# Allegro board JY02A_TEST_V10A.brd
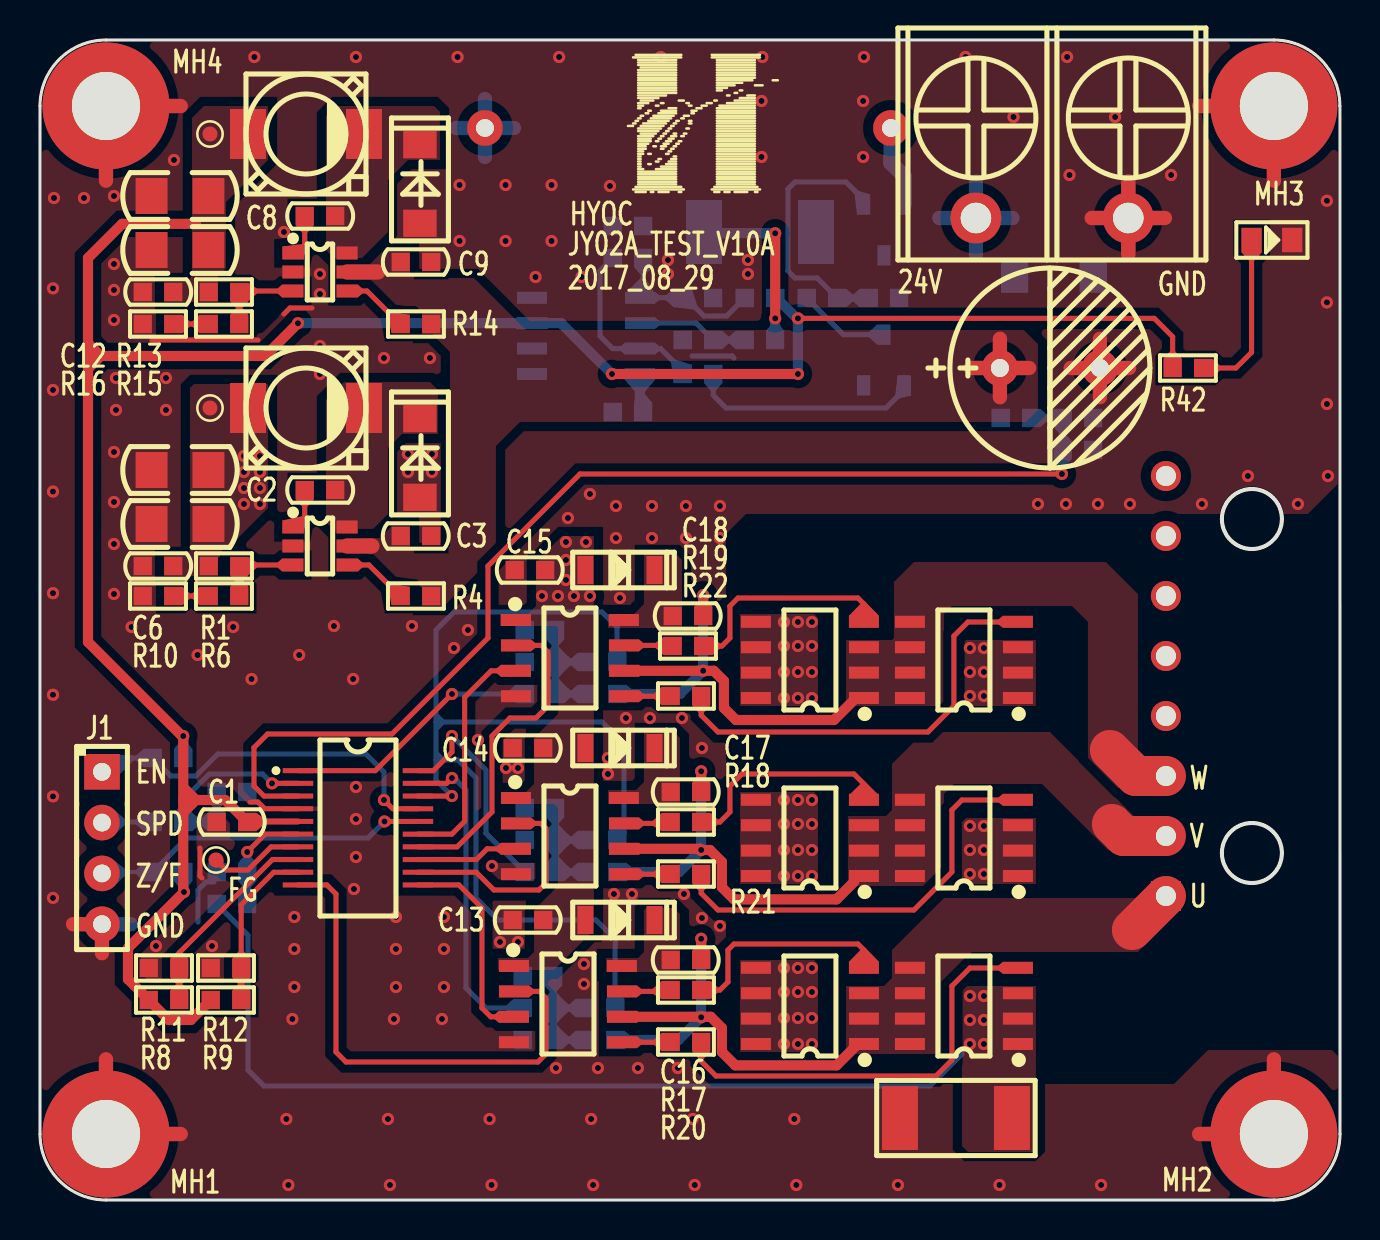
[diagram p0: board, top side]
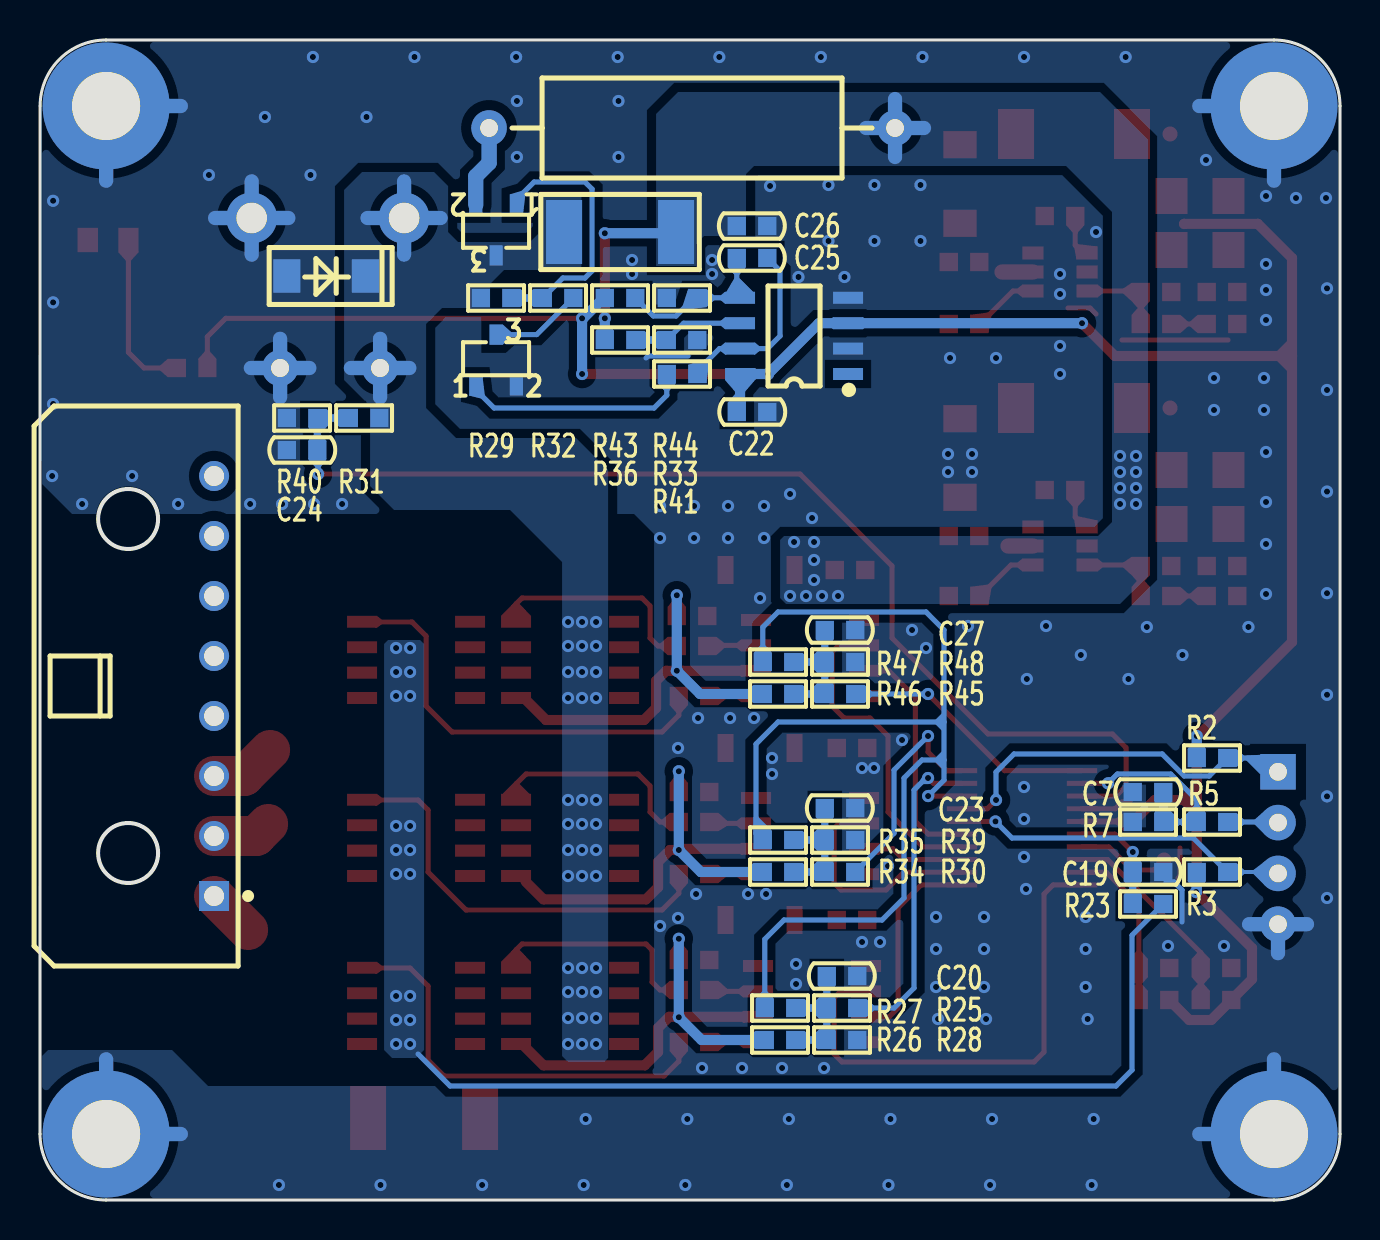
[diagram p1: board, bottom side, seen from below]

Outline 65.01 x 58 mm; copper layers: TOP, BOTTOM. Coordinates in mm from the lower left corner of the outline.
Outline path: 0,54.7 0,3.3 arc(0.97,0.97) 3.3,0 61.71,0 arc(64.04,0.96) 65.01,3.29 65,54.7 arc(64.03,57.03) 61.7,58 3.3,58 arc(0.97,57.03) 0,54.7

## Placement (name value [footprint] x y rotation side)
C1  0.1uF_50V  [CC0603]  9.6 18.9 180 top
C2  10nF_50V  [CC0603]  14 35.5 0 top
C3  0.1uF_50V  [CC0603]  18.8 33.2 180 top
C4  10uF_25V  [CC1206]  7 33.8 180 top
C5  10uF_25V  [CC1206]  7 36.5 180 top
C6  0.1uF_50V  [CC0603]  5.9 31.7 0 top
C7  1uF_50V  [CC0603]  9.6 20.4 180 bottom
C8  10nF_50V  [CC0603]  14 49.2 0 top
C9  0.1uF_50V  [CC0603]  18.8 46.9 180 top
C10  10uF_25V  [CC1206]  7 50.2 180 top
C11  10uF_25V  [CC1206]  7 47.5 180 top
C12  0.1uF_50V  [CC0603]  5.9 45.4 0 top
C13  0.1uF_50V  [CC0603]  24.4 14 180 top
C14  0.1uF_50V  [CC0603]  24.4 22.6 180 top
C15  0.1uF_50V  [CC0603]  24.5 31.5 180 top
C16  1uF_50V  [CC0603]  32.3 12 180 top
C17  1uF_50V  [CC0603]  32.3 20.4 180 top
C18  1uF_50V  [CC0603]  32.4 29.2 180 top
C19  0.1uF_50V  [CC0603]  9.6 16.4 0 bottom
C20  0.47uF_50V  [CC0603]  24.9 11.2 0 bottom
C21  100uF_50V_10X13  [CAP-5R0-10X13]  48 41.6 0 top
C22  0.1uF_50V  [CC0603]  29.4 39.4 180 bottom
C23  0.47uF_50V  [CC0603]  25 19.6 0 bottom
C24  1uF_50V  [CC0603]  51.9 37.5 180 bottom
C25  100pF_50V  [CC0603]  29.4 47.1 0 bottom
C26  0.1uF_50V  [CC0603]  29.4 48.7 0 bottom
C27  0.47uF_50V  [CC0603]  25 28.5 0 bottom
D1  SS14  [DO-214AC]  19 37.1 270 top
D2  SS14  [DO-214AC]  19 50.8 270 top
D3  1N4148W-TP  [SOD-123]  27.4 14 0 top
D4  1N4148W-TP  [SOD-123]  27.4 22.6 0 top
D5  1N4148W-TP  [SOD-123]  27.4 31.5 0 top
D6  SS14  [DO-214AC]  50.7 46.2 0 bottom
D7  LED_GREEN  [LED0805]  61.6 48 0 top
J1  -  [HEADER4X1_2R54]  3.1 17.6 270 top
J2  -  [43650-0800]  56.3 25.7 0 bottom
J3  -  [KF7R62-2P]  46.8 49.1 0 top
L1  SLF6028T-4R7M1R6-PF  [L-SLF6028]  13.3 39.6 270 top
L2  SLF6028T-4R7M1R6-PF  [L-SLF6028]  13.3 53.3 270 top
MH1  HOLD-M3  [HOLD250D134]  3.3 3.3 0 top
MH2  HOLD-M3  [HOLD250D134]  61.7 3.3 0 top
MH3  HOLD-M3  [HOLD250D134]  61.7 54.7 0 top
MH4  HOLD-M3  [HOLD250D134]  3.3 54.7 0 top
NOREF  -  []  0 0 0 top
NOREF#2  -  []  0 0 0 top
NOREF#3  -  []  0 0 90 top
NOREF#4  -  []  0 0 90 top
NOREF#5  -  []  0 0 90 top
NOREF#6  -  []  0 0 0 top
Q1  SI4410BDY-T1-E3  [SOIC8]  38.5 9.7 90 top
Q2  SI4410BDY-T1-E3  [SOIC8]  38.5 18.1 90 top
Q3  SI4410BDY-T1-E3  [SOIC8]  38.5 27 90 top
Q4  SI4410BDY-T1-E3  [SOIC8]  46.2 9.7 90 top
Q5  SI4410BDY-T1-E3  [SOIC8]  46.2 18.1 90 top
Q6  SI4410BDY-T1-E3  [SOIC8]  46.2 27 90 top
Q7  MMBT5401LT1G  [SOT23_123]  42.2 48.5 0 bottom
Q8  MMBT5551LT1G  [SOT23_123]  42.2 42 180 bottom
R1  49.9k  [RC0603]  9.2 31.7 0 top
R2  10K  [RC0603]  6.4 22.1 180 bottom
R3  10K  [RC0603]  6.4 16.4 180 bottom
R4  100K  [RC0603]  18.8 30.2 0 top
R5  10K  [RC0603]  6.4 18.9 180 bottom
R6  0R  [RC0603]  9.2 30.2 180 top
R7  1M  [RC0603]  9.6 18.9 0 bottom
R8  10K  [RC0603]  6.2 10 0 top
R9  10K  [RC0603]  9.3 10 0 top
R10  3.61K  [RC0603]  5.9 30.2 180 top
R11  2.2K  [RC0603]  6.2 11.6 180 top
R12  2.2K  [RC0603]  9.3 11.6 180 top
R13  49.9k  [RC0603]  9.2 45.4 0 top
R14  100K  [RC0603]  18.8 43.8 0 top
R15  0R  [RC0603]  9.2 43.8 180 top
R16  9.53K  [RC0603]  5.9 43.8 180 top
R17  51R  [RC0603]  32.3 10.5 180 top
R18  51R  [RC0603]  32.3 18.9 180 top
R19  51R  [RC0603]  32.4 27.7 180 top
R20  51R  [RC0603]  32.3 7.9 180 top
R21  51R  [RC0603]  32.3 16.3 180 top
R22  51R  [RC0603]  32.3 25.2 180 top
R23  10K  [RC0603]  9.6 14.8 0 bottom
R24  0R02  [RC2512]  45.8 4.1 0 top
R25  10K  [RC0603]  24.9 9.6 0 bottom
R26  100K  [RC0603]  28 8 0 bottom
R27  10K  [RC0603]  28 9.6 180 bottom
R28  10K  [RC0603]  24.9 8 180 bottom
R29  2.2K  [RC0603]  42.2 45.1 180 bottom
R30  10K  [RC0603]  25 16.4 0 bottom
R31  100K  [RC0603]  48.8 39.1 0 bottom
R32  10K  [RC0603]  39.1 45.1 180 bottom
R33  3K  [RC0603]  32.9 43 0 bottom
R34  100K  [RC0603]  28.1 16.4 0 bottom
R35  10K  [RC0603]  28.1 18 180 bottom
R36  10K  [RC0603]  36 43 180 bottom
R37  MFR02WF2000A10  [AXIAL-0R8]  32.4 53.6 0 bottom
R38  4.7K/1W  [RC2512]  36 48.4 0 bottom
R39  10K  [RC0603]  25 18 180 bottom
R40  10K  [RC0603]  51.9 39.1 0 bottom
R41  1K  [RC0603]  32.9 41.3 0 bottom
R42  1K  [RC0603]  57.4 41.6 180 top
R43  2.2K  [RC0603]  36 45.1 180 bottom
R44  2.2K  [RC0603]  32.9 45.1 0 bottom
R45  10K  [RC0603]  25 25.3 0 bottom
R46  100K  [RC0603]  28.1 25.3 0 bottom
R47  10K  [RC0603]  28.1 26.9 180 bottom
R48  10K  [RC0603]  25 26.9 180 bottom
TP1  TestPoint  [TP-0R75]  8.5 39.6 0 top
TP2  TestPoint  [TP-0R75]  8.5 53.3 0 top
TP3  TestPoint  [TP-0R75]  8.8 17 0 top
U1  JY02A  [SSOP-20]  15.9 18.6 270 top
U2  MP2359DJ-LF-Z  [TSOT23-6]  14 32.7 270 top
U3  MP2359DJ-LF-Z  [TSOT23-6]  14 46.4 270 top
U4  IR2101S  [SOIC8]  26.4 9.8 270 top
U5  IR2101S  [SOIC8]  26.5 18.2 270 top
U6  IR2101S  [SOIC8]  26.5 27.1 270 top
U7  LM2904VQDR  [SOIC8]  27.3 43.2 90 bottom

## Library data of the parts
C1-C20 C22-C27 = CAP NP_2
C21 = CAPT_100UF_3528_6r3V_10%_LXXXX
D1 D2 D6 = DIODE13_0
D3-D5 = DIODE13_7
D7 = LED_4
J1 = CONN RCPT 4
J2 = 43650-0801
J3 = CONN RCPT 2
L1 L2 = INDUCTOR_0
MH1-MH4 = Hold_1
Q1-Q6 = SI4410BDY-T1-E3
Q7 = L14G1/TO_1
Q8 = L14G1/TO_2
R1-R23 R25-R36 R39-R48 = R_Generic
R24 R37 R38 = R_10k_2
TP1-TP3 = TestPoint
U1 = JY02A
U2 U3 = MP2359DJ-LF-Z
U4-U6 = IR2101S
U7 = LM2904VQDR

## Footprints (pads in the part's own frame, mm; a bottom-side part is the same pattern mirrored in y, then rotated)
43650-0800
  rect 1.5x1.5 hole 1: 1(0,10.5)
  round 1.5 hole 1: 2(0,7.5) 3(0,4.5) 4(0,1.5) 5(0,-1.5) 6(0,-4.5) 7(0,-7.5) 8(0,-10.5)
AXIAL-0R8
  round 1.778 hole 0.889: 1(-10.15,0) 2(10.15,0)
CAP-5R0-10X13
  round 1.8 hole 0.9: 1(0,0) 2(5,0)
CC0603
  rect 0.914x0.914 smd: 1(-0.762,0) 2(0.762,0)
CC1206
  rect 1.6x1.8 smd: 1(-1.422,0) 2(1.422,0)
DO-214AC
  rect 1.36x1.67 smd: 1(1.965,0) 2(-1.965,0)
HEADER4X1_2R54
  rect 1.778x1.778 hole 0.889: 1(-3.81,0)
  round 1.778 hole 0.889: 2(-1.27,0) 3(1.27,0) 4(3.81,0)
HOLD250D134
  round 6.35 hole 3.404: 1(0,0)
KF7R62-2P
  round 2.54 hole 1.524: 1(0,0) 2(7.62,0)
L-SLF6028
  rect 2.5x1.8 smd: 1(0,2.9) 2(0,-2.9)
LED0805
  rect 1.016x1.219 smd: 1(-1.016,0) 2(1.016,0)
RC0603
  rect 0.914x0.914 smd: 1(-0.762,0) 2(0.762,0)
RC2512
  rect 1.8x3.2 smd: 1(-2.8,0) 2(2.8,0)
SOD-123
  rect 0.8x1.4 smd: 1(-0.127,0) 2(3.327,0)
SOIC8
  rect 0.6x1.5 smd: 1(-1.9,-2.7) 2(-0.63,-2.7) 3(0.64,-2.7) 4(1.91,-2.7) 5(1.91,2.7) 6(0.64,2.7) 7(-0.63,2.7) 8(-1.9,2.7)
SOT23_123
  rect 0.66x1.016 smd: 1(-1.016,-1.27) 2(1.016,-1.27) 3(0,1.27)
SSOP-20
  rect 0.25x1.52 smd: 1(-2.868,-3) 2(-2.232,-3) 3(-1.597,-3) 4(-0.963,-3) 5(-0.328,-3) 6(0.307,-3) 7(0.943,-3) 8(1.577,-3) 9(2.212,-3) 10(2.848,-3) 11(2.848,3) 12(2.212,3) 13(1.577,3) 14(0.943,3) 15(0.307,3) 16(-0.328,3) 17(-0.963,3) 18(-1.597,3) 19(-2.232,3) 20(-2.868,3)
TP-0R75
  round 0.75 smd: 1(0,0)
TSOT23-6
  rect 0.65x1.06 smd: 1(-0.95,-1.354) 2(0,-1.354) 3(0.95,-1.354) 4(0.95,1.354) 5(0,1.354) 6(-0.95,1.354)

## Nets
GND: C1.2 C3.1 C4.2 C5.2 C6.1 C7.1 C9.1 C10.2 C11.2 C12.1 C13.2 C14.2 C15.2 C19.1 C20.1 C21.2 C22.2 C23.1 C24.1 C26.1 C27.1 D1.1 D2.1 D6.1 D7.2(CATHODE) J1.4 J3.2 MH1.1 MH2.1 MH3.1 MH4.1 Q8.2(E) R7.2 R10.2 R11.2 R12.2 R16.2 R24.1 R28.2 R33.1 R39.2 R40.2 R44.2 R48.2 U1.4(GND) U2.2(GND) U3.2(GND) U4.4(COM) U5.4(COM) U6.4(COM) U7.2(1IN-) U7.4(GND)
VCC_5V: C1.1 C10.1 C11.1 C12.2 C22.1 L2.2 R2.1 R3.1 R8.1 R9.1 R13.1 R42.2 R43.1 TP2.1 U1.5(VDD) U7.3(1IN+) U7.8(VCC)
VCC_12V: C4.1 C5.1 C6.2 C13.1 C14.1 C15.1 C26.2 D3.1(ANODE) D4.1(ANODE) D5.1(ANODE) L1.2 R1.1 R36.1 R37.1 R38.1 TP1.1 U4.1(VCC) U5.1(VCC) U6.1(VCC)
VCC_24V: C3.2 C9.2 C21.1 D6.2 J3.1 Q1.5(D_1) Q1.6(D_2) Q1.7(D_3) Q1.8(D_4) Q2.5(D_1) Q2.6(D_2) Q2.7(D_3) Q2.8(D_4) Q3.5(D_1) Q3.6(D_2) Q3.7(D_3) Q3.8(D_4) Q7.3(C) R4.2 R14.2 R29.1 R31.1 R38.2 U2.5(IN) U3.5(IN)
AB: U1.11(AB) U4.3(LIN)
AT: U1.10(AT) U4.2(HIN)
BB: U1.13(BB) U5.3(LIN)
BT: U1.12(BT) U5.2(HIN)
CB: U1.15(CB) U6.3(LIN)
CT: U1.14(CT) U6.2(HIN)
EL#: J1.1 R2.2 U1.17(EL)
EMF: R27.1 R35.1 R47.1 U1.18(EMF)
EMFA: R25.1 U1.19(EMFA)
EMFB: R30.1 U1.20(EMFB)
EMFC: R45.1 U1.1(EMFC)
FG: TP3.1 U1.7(FG)
IS: C19.2 R23.2 U1.6(IS)
MOTOR_U: C16.1 J2.1 Q1.1(S_1) Q1.2(S_2) Q1.3(S_3) Q4.5(D_1) Q4.6(D_2) Q4.7(D_3) Q4.8(D_4) R26.2 U4.6(VS)
MOTOR_V: C17.1 J2.2 Q2.1(S_1) Q2.2(S_2) Q2.3(S_3) Q5.5(D_1) Q5.6(D_2) Q5.7(D_3) Q5.8(D_4) R34.2 U5.6(VS)
MOTOR_W: C18.1 J2.3 Q3.1(S_1) Q3.2(S_2) Q3.3(S_3) Q6.5(D_1) Q6.6(D_2) Q6.7(D_3) Q6.8(D_4) R46.2 U6.6(VS)
STIME: R8.2 R11.1 U1.8(STIME)
TORGUE: R9.2 R12.1 U1.9(TORGUE)
VOD: C24.2 R31.2 R40.1 U1.3(VOD)
VR: C7.2 R5.1 R7.1 U1.2(VR)
Z/F: J1.3 R3.2 U1.16(Z/F)
N16934906: D7.1(ANODE) R42.1
N16936692: C16.2 D3.2(CATHODE) U4.8(VB)
N16936701: R17.2 U4.7(HO)
N16936704: R20.2 U4.5(LO)
N16937026: Q1.4(G) R17.1
N16937206: Q4.4(G) R20.1
N16937240: Q4.1(S_1) Q4.2(S_2) Q4.3(S_3) Q5.1(S_1) Q5.2(S_2) Q5.3(S_3) Q6.1(S_1) Q6.2(S_2) Q6.3(S_3) R23.1 R24.2
N16938453: C17.2 D4.2(CATHODE) U5.8(VB)
N16938459: R18.2 U5.7(HO)
N16938461: R21.2 U5.5(LO)
N16938515: Q2.4(G) R18.1
N16938556: Q5.4(G) R21.1
N16939336: C18.2 D5.2(CATHODE) U6.8(VB)
N16939342: R19.2 U6.7(HO)
N16939344: R22.2 U6.5(LO)
N16939398: Q3.4(G) R19.1
N16939439: Q6.4(G) R22.1
N16940922: C20.2 R25.2 R26.1 R27.2 R28.1
N16941559: C23.2 R30.2 R34.1 R35.2 R39.1
N16941955: C27.2 R45.2 R46.1 R47.2 R48.1
N16944598: J1.2 R5.2
N16947370: C25.2 R43.2 R44.1 U7.5(2IN+)
N16947961: R33.2 R36.2 U7.6(2IN-)
N16948008: C25.1 R41.1 U7.7(2OUT)
N16948147: Q8.1(B) R41.2
N16952645: Q8.3(C) R32.2
N16952665: Q7.1(B) R29.2 R32.1
N16952973: Q7.2(E) R37.2
N16955297: C2.2 D1.2 L1.1 U2.6(SW)
N16955299: C2.1 U2.1(BST)
N16955317: R1.2 R6.1 U2.3(FB)
N16955459: R4.1 U2.4(EN)
N16956846: R6.2 R10.1
N16960800: R15.2 R16.1
N16960840: C8.2 D2.2 L2.1 U3.6(SW)
N16960842: C8.1 U3.1(BST)
N16960860: R13.2 R15.1 U3.3(FB)
N16960963: R14.1 U3.4(EN)

Pads without a net: J2 4 5 6 7 8; U7 1

## Via types
v1: diameter 0.61, hole 0.305, TOP to BOTTOM, 244 vias

## Routing (per net, layer and track width the routed paths; a pad name or vN(x,y) marks a point on that pad's centre or on a via; arc(x,y) is an arc through that point)
GND: length 109
  TOP w0.203: 43,0.85 v1(42.9,0.75)
  TOP w0.254: 8,17.6 8,16.2 8.1,16.1 ; 12.2,44.3 12.5,44.6 13.6,44.6 ; U1.4 11.24,19.56 10.9,19.9 10.5,19.9 ; 5.6,43 10.9,43
  TOP w0.711: 51.54,41.6 C21.2 ; C21.2 54.46,41.6 ; C21.2 53,40.14 ; C21.2 53,43.06 ; 1.65,13.79 J1.4 3.1,12.34 ; 52.59,49.1 J3.2 ; J3.2 56.25,49.1 ; J3.2 54.42,47.27 ; J3.2 54.42,50.93 ; 7.03,3.3 MH1.1 3.3,7.03 ; 61.7,7.03 MH2.1 57.97,3.3 ; 7.03,54.7 MH4.1 3.3,50.97 ; 61.7,50.97 MH3.1 57.97,54.7
  BOTTOM w0.254: 8.7,15.9 8.3,15.9 7.9,15.5 7.9,13.9 ; 34.7,42.1 34.6,42.2 32.6,42.2
  BOTTOM w0.711: J3.2 56.25,49.1 ; J3.2 54.42,47.27 ; J3.2 52.59,49.1 ; J3.2 54.42,50.93 ; 61.7,50.97 MH3.1 57.97,54.7 ; 1.65,13.79 J1.4 ; J1.4 3.1,12.34 ; J1.4 4.55,13.79 ; 57.97,3.3 MH2.1 61.7,7.03 ; 3.3,50.97 MH4.1 7.03,54.7 ; 53,40.14 C21.2 ; C21.2 53,43.06 ; C21.2 51.54,41.6 ; C21.2 54.46,41.6 ; 3.3,7.03 MH1.1 7.03,3.3
  vias: v1(0.7,50.1) v1(0.65,45.58) v1(0.65,40.5) v1(0.65,35.42) v1(0.65,30.34) v1(0.65,25.26) v1(0.65,20.18) v1(0.65,15.1) v1(2.2,50.1) v1(3.7,50.2) v1(3.7,46.8) v1(3.7,45.5) v1(3.7,44) v1(3.7,37.4) v1(3.7,34.9) v1(3.7,32.8) v1(3.7,30.3) v1(3.8,41.1) v1(3.8,39.5) v1(4.58,28.65) v1(5.8,12.7) v1(6.3,41.1) v1(6.3,39.5) v1(6.7,52) v1(7.88,27.25) v1(8.6,12.7) v1(9.66,28.65) v1(10.58,26.05) v1(10.72,57.15) v1(12.2,48.4) v1(12.32,4.05) v1(12.42,0.75) v1(12.62,9.05) v1(12.72,14.15) v1(12.72,12.55) v1(12.72,10.65) v1(12.96,27.25) v1(14,46.3) v1(14,45.3) v1(14,42.7) v1(14,41.3) v1(14.7,28.7) v1(15.66,26.05) v1(15.7,15.55) v1(15.8,57.15) v1(15.8,20.65) v1(15.8,19.05) v1(15.8,17.15) v1(17.2,42.1) v1(17.4,4.05) v1(17.5,0.75) v1(17.7,9.05) v1(17.8,14.15) v1(17.8,12.55) v1(17.8,10.65) v1(18.4,37.3) v1(18.4,36.4) v1(18.6,28.7) v1(19.5,42.1) v1(19.6,37.3) v1(19.6,36.4) v1(20.1,9.05) v1(20.2,14.15) v1(20.2,12.55) v1(20.2,10.65) v1(20.7,27.6) v1(20.88,57.15) v1(20.98,50.75) v1(20.98,47.95) v1(21.4,28.5) v1(21.9,23) v1(22.48,4.05) v1(22.6,16.7) v1(22.58,0.75) v1(23,12.9) v1(23.28,50.75) v1(23.28,47.95) v1(23.3,21.6) v1(23.9,21.6) v1(23.9,12.9) v1(24.78,46.15) v1(25.58,50.75) v1(25.58,47.95) v1(25.8,6.6) v1(25.96,57.15) v1(26.4,34.1) v1(27.08,46.15) v1(27.2,11.8) v1(27.2,10.8) v1(27.5,35.3) v1(27.56,4.05) v1(27.66,0.75) v1(27.9,6.6) v1(28.4,22.1) v1(28.4,21.3) v1(28.5,50.7) v1(28.7,15.3) v1(28.8,34.7) v1(28.8,33.1) v1(29,30.1) v1(29.3,24.1) v1(29.6,15.3) v1(29.9,6.6) v1(30.5,24.1) v1(30.6,34.7) v1(30.6,33.1) v1(31.04,57.15) v1(31.4,47) v1(31.4,46.3) v1(31.9,6.6) v1(32.1,24.1) v1(32.2,15.3) v1(32.3,34.7) v1(32.3,33.1) v1(32.64,4.05) v1(32.74,0.75) v1(33.1,22.6) v1(33.1,14.1) v1(34,34.7) v1(34,33.1) v1(34,13.7) v1(35.4,47) v1(35.4,46.3) v1(36.12,57.15) v1(36.08,54.95) v1(36.08,52.15) v1(37.72,4.05) v1(37.82,0.75) v1(41.2,57.15) v1(41.16,54.95) v1(41.16,52.15) v1(46.28,57.15) v1(47.98,0.75) v1(48.68,54.15) v1(49.9,34.8) v1(51.3,34.8) v1(51.36,57.15) v1(51.48,51.25) v1(52.9,34.8) v1(53.06,0.75) v1(53.76,54.15) v1(54.5,34.8) v1(56.56,51.25) v1(58.1,34.8) v1(60.4,36.2) v1(62.9,34.8) v1(64.35,49.96) v1(64.35,44.88) v1(64.35,39.8) v1(64.4,36.2)
VCC_5V: length 124.7
  TOP w0.254: v1(37.9,44.08) 55.72,44.08 56.64,43.16 R42.2
  TOP w0.3: C1.1 10.39,18.93 U1.5
  TOP w0.508: 2.4,42.2 2.4,47.1 4.11,48.81 7.79,48.81 7.8,48.8 ; 2.4,42.2 2.4,27.9 7.1,23.2 v1(7.16,23.2) 7.16,20 ; 2.4,42.2 11.26,42.2 v1(12.9,43.84) ; v1(37.9,41.3) v1(28.6,41.3) ; 7.16,20 9.26,20 C1.1 ; 7.16,20 7.16,15.44 v1(7.2,15.4) 4.4,12.6 4.4,11.04 R8.1 6.44,9 7.54,9 R9.1
  BOTTOM w0.254: v1(37.9,44.08) 37.9,44.02
  BOTTOM w0.508: C22.1 30,39.56 U7.8 v1(28.6,41.3) 26.06,43.84 U7.3 v1(12.9,43.84) ; R3.1 7.16,15.44 v1(7.2,15.4) ; R2.1 v1(7.16,23.2) ; v1(37.9,41.3) 37.9,44.02 36.82,45.1 R43.1
VCC_12V: length 14.7
  TOP w0.508: v1(36.76,44.08) v1(36.76,48.34)
  BOTTOM w0.508: R38.1 33.26,48.34 v1(36.76,48.34) ; R36.1 v1(36.76,44.08)
  BOTTOM w0.711: R37.1 23.7,53.6 ; R37.1 22.25,55.05 ; R37.1 22.25,52.15 ; R37.1 20.8,53.6
  vias: v1(10.2,37.2) v1(10.2,36.4) v1(10.2,35.6) v1(10.2,34.8) v1(11,37.2) v1(11,36.4) v1(11,35.6) v1(11,34.8) v1(25.1,30.2) v1(25.9,30.2) v1(26.3,32.9) v1(26.3,32) v1(26.3,31) v1(26.7,30.2) v1(27.3,32.9) v1(27.5,30.2)
VCC_24V: length 21.8
  TOP w0.711: C21.1 48,43.06 ; C21.1 48,40.14 ; C21.1 49.46,41.6 ; C21.1 46.54,41.6
  TOP w0.762: U3.5 16.9,46.4 ; U2.5 16.6,32.7
  BOTTOM w0.711: 44.97,49.1 J3.1 ; J3.1 46.8,50.93 ; J3.1 46.8,47.27 ; J3.1 48.63,49.1 ; C21.1 49.46,41.6 ; C21.1 46.54,41.6 ; C21.1 48,43.06 ; C21.1 48,40.14
  vias: v1(37.2,28.9) v1(37.2,27.7) v1(37.2,26.4) v1(37.2,25.1) v1(37.2,20) v1(37.2,18.8) v1(37.2,17.5) v1(37.2,16.2) v1(37.2,11.6) v1(37.2,10.4) v1(37.2,9.1) v1(37.2,7.8) v1(37.9,28.9) v1(37.9,27.7) v1(37.9,26.4) v1(37.9,25.1) v1(37.9,20) v1(37.9,18.8) v1(37.9,17.5) v1(37.9,16.2) v1(37.9,11.6) v1(37.9,10.4) v1(37.9,9.1) v1(37.9,7.8) v1(38.6,28.9) v1(38.6,27.7) v1(38.6,26.4) v1(38.6,25.1) v1(38.6,20) v1(38.6,18.8) v1(38.6,17.5) v1(38.6,16.2) v1(38.6,11.6) v1(38.6,10.4) v1(38.6,9.1) v1(38.6,7.8)
AB: length 10.5
  TOP w0.254: U1.11 20.95,15.75 22.1,14.6 22.1,9.6 22.54,9.16 U4.3
AT: length 25.4
  TOP w0.254: U1.10 14.35,15.75 14.8,15.3 14.8,7.4 15.3,6.9 24.9,6.9 25.3,7.3 25.3,10.1 24.97,10.43 U4.2
BB: length 5.1
  TOP w0.254: U1.13 21.82,17.02 22.36,17.56 U5.3
BT: length 11.2
  TOP w0.254: U5.2 25.05,18.83 25.3,18.58 25.3,15.85 24.95,15.5 22.7,15.5 21.81,16.39 U1.12
CB: length 11.9
  TOP w0.254: U1.15 20.59,18.29 21.23,18.94 21.23,25.14 22.56,26.46 U6.3
CT: length 16.1
  TOP w0.254: U6.2 25.07,27.73 25.4,27.4 25.4,24.7 24.8,24.1 23.5,24.1 22.6,23.2 22.6,19.4 20.86,17.66 U1.14
EL#: length 18.9
  TOP w0.254: v1(17.2,20) 17.64,19.56 U1.17
  BOTTOM w0.254: J1.1 3.79,22.1 R2.2 6.54,21.2 7.79,21.2 8.89,22.3 16.3,22.3 17.2,21.4 v1(17.2,20)
EMF: length 56.2
  TOP w0.254: U1.18 v1(20.6,20.2)
  BOTTOM w0.254: 19.8,22 19.8,21 v1(20.6,20.2) ; 19.8,22 20.9,22 21.8,21.1 21.8,15.1 22.9,14 27.8,14 28.76,13.04 R27.1 ; 19.8,22 19.8,23.9 ; 19.8,23.9 19.8,28.5 20.7,29.4 28.1,29.4 28.86,28.64 R47.1 ; 19.8,23.9 28.1,23.9 29.2,22.8 29.2,18.34 R35.1
EMFA: length 15.9
  TOP w0.254: v1(20.6,21.1) 20.33,20.83 U1.19
  BOTTOM w0.254: R25.1 22.3,9.6 21.3,10.6 21.3,20.5 20.7,21.1 v1(20.6,21.1)
EMFB: length 11.2
  TOP w0.254: v1(20.6,23.2) 20.6,22.4 19.67,21.47 U1.20
  BOTTOM w0.254: R30.1 22.3,18.34 22.3,21.5 v1(20.6,23.2)
EMFC: length 12.9
  TOP w0.254: v1(20.6,25.3) 16.77,21.47 U1.1
  BOTTOM w0.254: R45.1 v1(20.6,25.3)
FG: length 4.8
  TOP w0.254: U1.7 11.56,17.66 10.4,16.5 9.3,16.5 TP3.1
IS: length 5.5
  TOP w0.254: v1(10.36,17.4) 11.25,18.29 U1.6
  BOTTOM w0.254: v1(10.36,17.4) C19.2 R23.2
MOTOR_U: length 26.5
  TOP w0.508: v1(33.06,9.14) 33.02,9.14 33,9.16 ; C16.1 v1(33.06,13.06) ; Q1.1 40.9,7.8 39.83,6.73 34.77,6.73 34.1,7.4 34.1,8.6 33.54,9.16 33,9.16 ; 33,9.16 U4.6
  TOP w2: J2.1 54.6,13.5
  BOTTOM w0.508: v1(33.06,13.06) v1(33.06,9.14) 31.92,8 R26.2
MOTOR_V: length 26.3
  TOP w0.508: C17.1 v1(33.06,21.44) ; U5.6 33,17.56 v1(33.06,17.5) 33.5,17.5 34.1,16.9 34.1,15.63 34.7,15.03 39.83,15.03 40.72,15.92
  TOP w2: J2.2 54.2,18.2 53.6,18.8
  BOTTOM w0.508: v1(33.06,21.44) v1(33.06,17.5) 31.96,16.4 R34.2
MOTOR_W: length 27.5
  TOP w0.254: 32.9,26.46 32.9,26.46 v1(33.16,26.46)
  TOP w0.508: U6.6 33.69,26.46 34.2,25.95 34.2,24.6 34.8,24 39.7,24 40.8,25.1 Q3.1 ; C18.1 v1(33.16,30.24)
  TOP w2: 53.5,22.5 54.8,21.2 J2.3
  BOTTOM w0.508: R46.2 32,25.3 v1(33.16,26.46) v1(33.16,30.24)
STIME: length 10.2
  TOP w0.254: R8.2 R11.1 6.96,12.36 11.62,17.02 U1.8
TORGUE: length 8.3
  TOP w0.254: U1.9 11.69,16.39 10.06,14.76 R12.1 R9.2
VOD: length 56.9
  TOP w0.254: v1(51.1,36.3) 27,36.3 22.4,31.7 22.4,28.1 17.6,23.3 11.38,23.3 10.7,22.62 10.7,20.7 11.2,20.2 U1.3
  BOTTOM w0.254: v1(51.1,36.3) 51.1,37.46 C24.2 R40.1 R31.2
VR: length 10.7
  TOP w0.254: U1.2 v1(11.6,20.83)
  BOTTOM w0.254: C7.2 R7.1 R5.1 7.16,20 8.46,21.3 11.13,21.3 v1(11.6,20.83)
Z/F: length 16.9
  TOP w0.254: U1.16 v1(17.23,18.93)
  BOTTOM w0.203: R3.2 3.17,16.4 J1.3
  BOTTOM w0.254: R3.2 7.34,18.1 16.4,18.1 v1(17.23,18.93)
N16934906: length 8.4
  TOP w0.254: D7.1 60.58,42.38 59.8,41.6 R42.1
N16936701: length 2.5
  TOP w0.254: U4.7 31.47,10.43 R17.2
N16936704: length 2.4
  TOP w0.254: R20.2 31.53,7.89 U4.5
N16937026: length 11
  TOP w0.254: Q1.4 41.2,12.5 40.9,12.8 34.7,12.8 34.4,12.5 34.4,10.9 34,10.5 R17.1
N16937206: length 21.5
  TOP w0.254: R20.1 33.06,6.94 33.8,6.2 44.8,6.2 45.6,7 45.6,10.7 46.5,11.6 48.89,11.6 Q4.4
N16937240: length 45.6
  BOTTOM w0.254: 46.1,7.3 44.5,5.7 11.2,5.7 10.4,6.5 10.4,13.24 R23.1
  vias: v1(46.5,27.6) v1(46.5,26.4) v1(46.5,25.2) v1(46.5,18.7) v1(46.5,17.5) v1(46.5,16.3) v1(46.5,10.2) v1(46.5,9) v1(46.5,7.8) v1(47.2,27.6) v1(47.2,26.4) v1(47.2,25.2) v1(47.2,18.7) v1(47.2,17.5) v1(47.2,16.3) v1(47.2,10.2) v1(47.2,9) v1(47.2,7.8)
N16938459: length 2.4
  TOP w0.254: U5.7 31.47,18.83 R18.2
N16938461: length 2.3
  TOP w0.254: R21.2 31.53,16.29 U5.5
N16938515: length 10.9
  TOP w0.254: R18.1 34,18.9 34.5,19.4 34.5,20.7 35.1,21.3 40.7,21.3 41.2,20.8 Q2.4
N16938556: length 21.2
  TOP w0.254: R21.1 33.06,15.34 33.9,14.5 43.7,14.5 45.6,16.4 45.6,19.5 46.1,20 48.89,20 Q5.4
N16939342: length 2.5
  TOP w0.254: U6.7 31.61,27.73 R19.2
N16939344: length 2.3
  TOP w0.254: U6.5 31.53,25.19 R22.2
N16939398: length 11
  TOP w0.254: R19.1 34.1,27.7 34.5,28.1 34.5,29.7 34.9,30.1 40.9,30.1 41.2,29.8 Q3.4
N16939439: length 21.5
  TOP w0.254: Q6.4 48.89,28.9 46.4,28.9 45.7,28.2 45.7,24.7 44.4,23.4 33.9,23.4 33.06,24.24 R22.1
N16940922: length 6.4
  BOTTOM w0.254: R25.2 R28.1 R26.1 ; R25.2 R27.2 ; R25.2 C20.2
N16941559: length 6.4
  BOTTOM w0.254: R39.1 C23.2 ; R39.1 R35.2 ; R39.1 R30.2 R34.1
N16941955: length 6.4
  BOTTOM w0.254: R46.1 R45.2 R48.1 ; R48.1 R47.2 ; R48.1 C27.2
N16944598: length 2.6
  BOTTOM w0.254: R5.2 3.13,18.9 J1.2
N16947370: length 8
  BOTTOM w0.254: C25.2 30.16,45.27 U7.5 32.13,45.11 R44.1 32.3,45.1 33.2,44.2 34.34,44.2 R43.2
N16947961: length 5.6
  BOTTOM w0.254: U7.6 32.82,43.84 R33.2 R36.2
N16948008: length 9.2
  BOTTOM w0.254: R41.1 32.14,41.46 31.03,42.57 U7.7 28.63,42.57 28,43.2 28,46.46 C25.1
N16948147: length 11.5
  BOTTOM w0.254: R41.2 33.66,40.24 34.3,39.6 42.3,39.6 43.22,40.52 Q8.1
N16952645: length 4.6
  BOTTOM w0.254: R32.2 40.17,43.27 Q8.3
N16952665: length 13.2
  BOTTOM w0.254: R29.2 R32.1 38.86,46.1 37.75,46.1 37.4,46.45 37.4,50.55 37.75,50.9 40.3,50.9 41.18,50.02 Q7.1
N16952973: length 4.1
  BOTTOM w0.762: R37.2 42.55,51.85 43.22,51.18 Q7.2
N16955299: length 2.2
  TOP w0.254: C2.1 13.24,34.14 12.75,33.65 U2.1
N16955317: length 4.2
  TOP w0.254: U2.3 10.01,31.75 R1.2 R6.1
N16955459: length 3.3
  TOP w0.254: R4.1 18,30.2 16.45,31.75 U2.4
N16956846: length 1.8
  TOP w0.254: R6.2 R10.1
N16960800: length 1.8
  TOP w0.254: R15.2 R16.1
N16960842: length 2.2
  TOP w0.254: C8.1 13.24,47.74 12.85,47.35 U3.1
N16960860: length 4.3
  TOP w0.254: U3.3 10.01,45.45 R13.2 R15.1
N16960963: length 3.4
  TOP w0.254: R14.1 18,43.8 16.35,45.45 U3.4

## Copper pours and planes (outline as drawn; the poured copper is in the pictures)
GND on TOP: 63.4,34.3 35.3,34.3 34.3,33.3 34.3,6.6 35.1,5.8 56.7,5.8 58.4,7.5 64.6,7.5 64.9,7.2 64.9,3.3 61.7,0.1 3.3,0.1 0.1,3.3 0.1,54.7 3.3,57.9 61.7,57.9 64.9,54.7 64.9,35.8 ; 4 cut-outs
GND on BOTTOM: 63.4,34.3 35.3,34.3 34.3,33.3 34.3,6.6 35.2,5.7 56.6,5.7 58.4,7.5 64.6,7.5 64.9,7.2 64.9,3.3 61.7,0.1 3.3,0.1 0.1,3.3 0.1,54.7 3.3,57.9 61.7,57.9 64.9,54.7 64.9,35.8 ; 6 cut-outs
VCC_5V on TOP: 6.2,44.9 8.9,44.9 8.9,46.2 9.3,46.6 9.3,49.9 11.4,52 11.4,54.7 8.2,54.7 7.6,54.1 7.6,46.2 7.3,45.9 6.2,45.9
VCC_12V on TOP: 22.9,11.5 22.9,12.1 24.4,12.1 24.7,12.4 24.7,14.5 25.9,15.7 25.9,19.6 25.7,19.8 23,19.8 23,20.4 24.3,20.4 24.7,20.8 24.7,23.1 25.9,24.3 25.9,28.6 25.8,28.7 23,28.7 23,29.3 24.4,29.3 24.8,29.7 24.8,31.9 26.1,33.2 27.7,33.2 27.7,13.5 25.7,11.5
VCC_12V on TOP: 6.2,31.2 8.9,31.2 8.9,32.1 11.4,34.6 11.4,40.8 7.7,40.8 7.5,40.6 7.5,32.5 7.2,32.2 6.2,32.2
VCC_12V on BOTTOM: 11,29.8 9.6,31.2 9.6,53 12,55.4 33.1,55.4 34.2,54.3 34.2,46.7 32.2,46.7 32.2,47.8 31.8,48.2 29.7,48.2 29.7,51.3 29.3,51.7 13.7,51.7 11.4,49.4 11.4,33.9 12.1,33.2 27.8,33.2 28,33 28,30.1 27.7,29.8
VCC_24V on TOP: 35,12 38.7,12 38.9,11.8 38.9,7.6 38.7,7.4 35,7.4
VCC_24V on TOP: 35,29.3 38.7,29.3 38.9,29.1 38.9,24.9 38.7,24.7 35,24.7
VCC_24V on TOP: 16.5,46 17.8,44.7 18.8,44.7 19.1,44.4 19.1,43.3 19.6,43.3 20.5,42.4 20.5,32.7 20.2,32.4 18.8,32.4 18.5,32.7 18.5,33.7 17.6,33.7 17,33.1 16.3,33.1 16.3,32.4 17.7,31 18.7,31 19.1,30.6 19.1,29.7 20.2,29.7 22.8,32.3 22.8,37.7 24,38.9 49.3,38.9 49.9,39.5 49.9,42.8 49.2,43.5 24.3,43.5 21.7,46.1 18.8,46.1 18.5,46.4 18.5,47.4 17.1,47.4 16.5,46.8
VCC_24V on TOP: 35,20.4 38.7,20.4 38.9,20.2 38.9,16 38.7,15.8 35,15.8
VCC_24V on BOTTOM: 36.8,6.9 36.6,7.1 36.6,36.5 38.2,38.1 44.2,38.1 45.7,39.6 45.7,43.8 44.9,44.6 42.5,44.6 42.5,45.8 41.8,46.5 37.8,46.5 37.8,50.2 39.9,50.2 39.9,48.5 40.5,47.9 44.1,47.9 44.6,48.4 44.6,50.7 45.3,51.4 48.9,51.4 49.8,50.5 49.8,41 48.5,39.7 48.5,35.7 47.3,34.5 41.5,34.5 38.9,31.9 38.9,7.2 38.6,6.9
MOTOR_U on TOP: 40.3,7.3 45,7.3 45.2,7.5 45.2,11 46.6,12.4 54.9,12.4 56.3,13.8 55,15.1 45.2,15.1 42.6,12.5 42.6,11.1 42.2,10.7 40.3,10.7
MOTOR_V on TOP: 40.4,15.7 44.2,15.7 45.2,16.7 45.2,20.3 45.7,20.8 50.1,20.8 53.4,17.5 55.2,17.5 55.4,17.7 55.4,18.5 50.5,23.4 44.2,23.4 42.6,21.8 42.6,19.5 42.3,19.2 40.4,19.2
MOTOR_W on TOP: 40.3,28 42.6,28 42.7,28.1 42.7,30.9 43.7,31.9 53.3,31.9 54.9,30.3 54.9,22.5 55.4,22 55.4,20.8 55.2,20.6 53.9,20.6 52.4,22.1 52.4,28.9 51.6,29.7 45.6,29.7 45.2,29.3 45.2,24.9 45,24.7 40.4,24.7 40.3,24.8
N16936692 on TOP: 28.3,11.4 32,11.4 32,14.3 31.7,14.6 30.3,14.6 30.2,14.5 30.2,12.4 29.9,12.1 28.3,12.1
N16937240 on TOP: 49.8,28 46.3,28 46.1,27.8 46.1,24.9 46.3,24.7 49.8,24.7
N16937240 on TOP: 46.4,2.4 46.1,2.7 46.1,10.5 46.3,10.7 49.8,10.7 49.8,2.6 49.6,2.4
N16937240 on TOP: 49.8,19.1 46.3,19.1 46.1,18.9 46.1,16 46.3,15.8 49.8,15.8
N16937240 on BOTTOM: 46,28 47.6,28 47.8,27.8 47.8,7.5 47.4,7.1 46.2,7.1 45.8,7.5 45.8,27.8
N16938453 on TOP: 28.4,19.8 32,19.8 32,23.1 31.7,23.4 30.2,23.4 30.2,20.9 29.8,20.5 28.4,20.5
N16939336 on TOP: 28.4,28.6 32.1,28.6 32.1,32 31.8,32.3 30.2,32.3 30.2,29.8 29.7,29.3 28.4,29.3
N16955297 on TOP: 14.8,33.4 16.5,33.4 17.4,34.3 17.4,37.6 18.1,38.3 19.9,38.3 19.9,40.5 19.5,40.9 15.2,40.9 14.3,40 14.3,33.9
N16960840 on TOP: 14.7,47.1 16.1,47.1 17.4,48.4 17.4,51 18.4,52 20,52 20,54.4 19.7,54.7 14.8,54.7 14.3,54.2 14.3,47.5
VCC_5V on TOP (solid shape): 3.21,42.38 3.29,42.2 3.21,42.02 2.58,41.39 2.34,41.95 2.34,42.45 2.58,43.01
VCC_5V on TOP (solid shape): 7.98,20.18 8.05,20 7.98,19.82 7.34,19.19 7.1,19.75 7.1,20.25 7.34,20.81
VCC_5V on BOTTOM (solid shape): 30.75,41 30.14,40.29 30,40.25 29.86,40.29 29.25,41 30,41.36
VCC_5V on BOTTOM (solid shape): 29.8,40.38 29.95,40.47 30.13,40.44 30.62,39.86 30.17,39.34 29.7,39.86
EL# on BOTTOM (solid shape): 4.65,22.22 4.74,22.14 4.72,22.02 3.99,21.29 3.07,21.4 3.87,22.26
EMF on BOTTOM (solid shape): 29.12,19.19 29.25,19.21 29.33,19.1 29.32,17.54 28.85,17.97 28.4,18.46
Z/F on BOTTOM (solid shape): 4.35,16.48 4.38,16.41 4.36,16.33 3.73,15.7 3.07,16.33 3.72,16.97
N16934906 on TOP (solid shape): 61.09,47.39 60.66,46.91 60.58,46.88 60.51,46.91 60.08,47.39 60.58,48.03
N16937026 on TOP (solid shape): 41.12,12.6 41.2,12.63 41.28,12.6 41.95,11.91 41.2,11.58 40.45,11.91
N16938515 on TOP (solid shape): 41.12,20.9 41.2,20.93 41.27,20.9 41.87,20.31 41.2,19.98 40.53,20.31
N16939398 on TOP (solid shape): 41.12,29.9 41.2,29.93 41.28,29.9 41.95,29.21 41.2,28.88 40.45,29.21
N16944598 on BOTTOM (solid shape): 4.29,18.99 4.33,18.9 4.3,18.81 3.73,18.24 3.07,18.87 3.72,19.5
N16947370 on BOTTOM (solid shape): 30.08,46.15 30.18,46.17 30.26,46.12 30.71,45.36 29.99,45.08 29.35,45.41
N16947370 on BOTTOM (solid shape): 32.88,44.67 32.85,44.56 32.76,44.52 31.68,44.64 32.11,45.12 32.6,45.56
N16948008 on BOTTOM (solid shape): 31.55,41.92 31.6,42.02 31.7,42.04 32.6,41.76 32.16,41.27 31.68,40.84
N16955299 on TOP (solid shape): 13.16,34.2 13.26,34.17 13.3,34.08 13.18,33.33 12.62,33.63 12.12,33.98
N16955459 on TOP (solid shape): 18.5,30.66 18.06,30.18 17.58,29.74 17.42,30.65 17.45,30.75 17.54,30.78
N16960963 on TOP (solid shape): 18.5,44.26 18.06,43.78 17.58,43.34 17.42,44.25 17.45,44.35 17.54,44.38

Small or netless copper shapes (teardrops, artwork), in the pictures only: 73 on TOP, 79 on BOTTOM

## Text on the board
Ref Des/Silkscreen Top: EN | SPD | Z/F | GND | FG | JY02A_TEST_V10A | 2017_08_29 | HYOC | 24V | W | V | U
DIMENSION: FIGURE | SIZE | 0.3048 | 0.889 | 0.9 | 1.0 | 1.524 | 3.4036 | DRILL CHART: TOP to BOTTOM | ALL UNITS ARE IN MILLIMETERS | PLATED | QTY | 244 | 6 | 2 | 8 | 4
